# EAGLE board CAN_node_rpm_f2v (EAGLE 7.2.0)
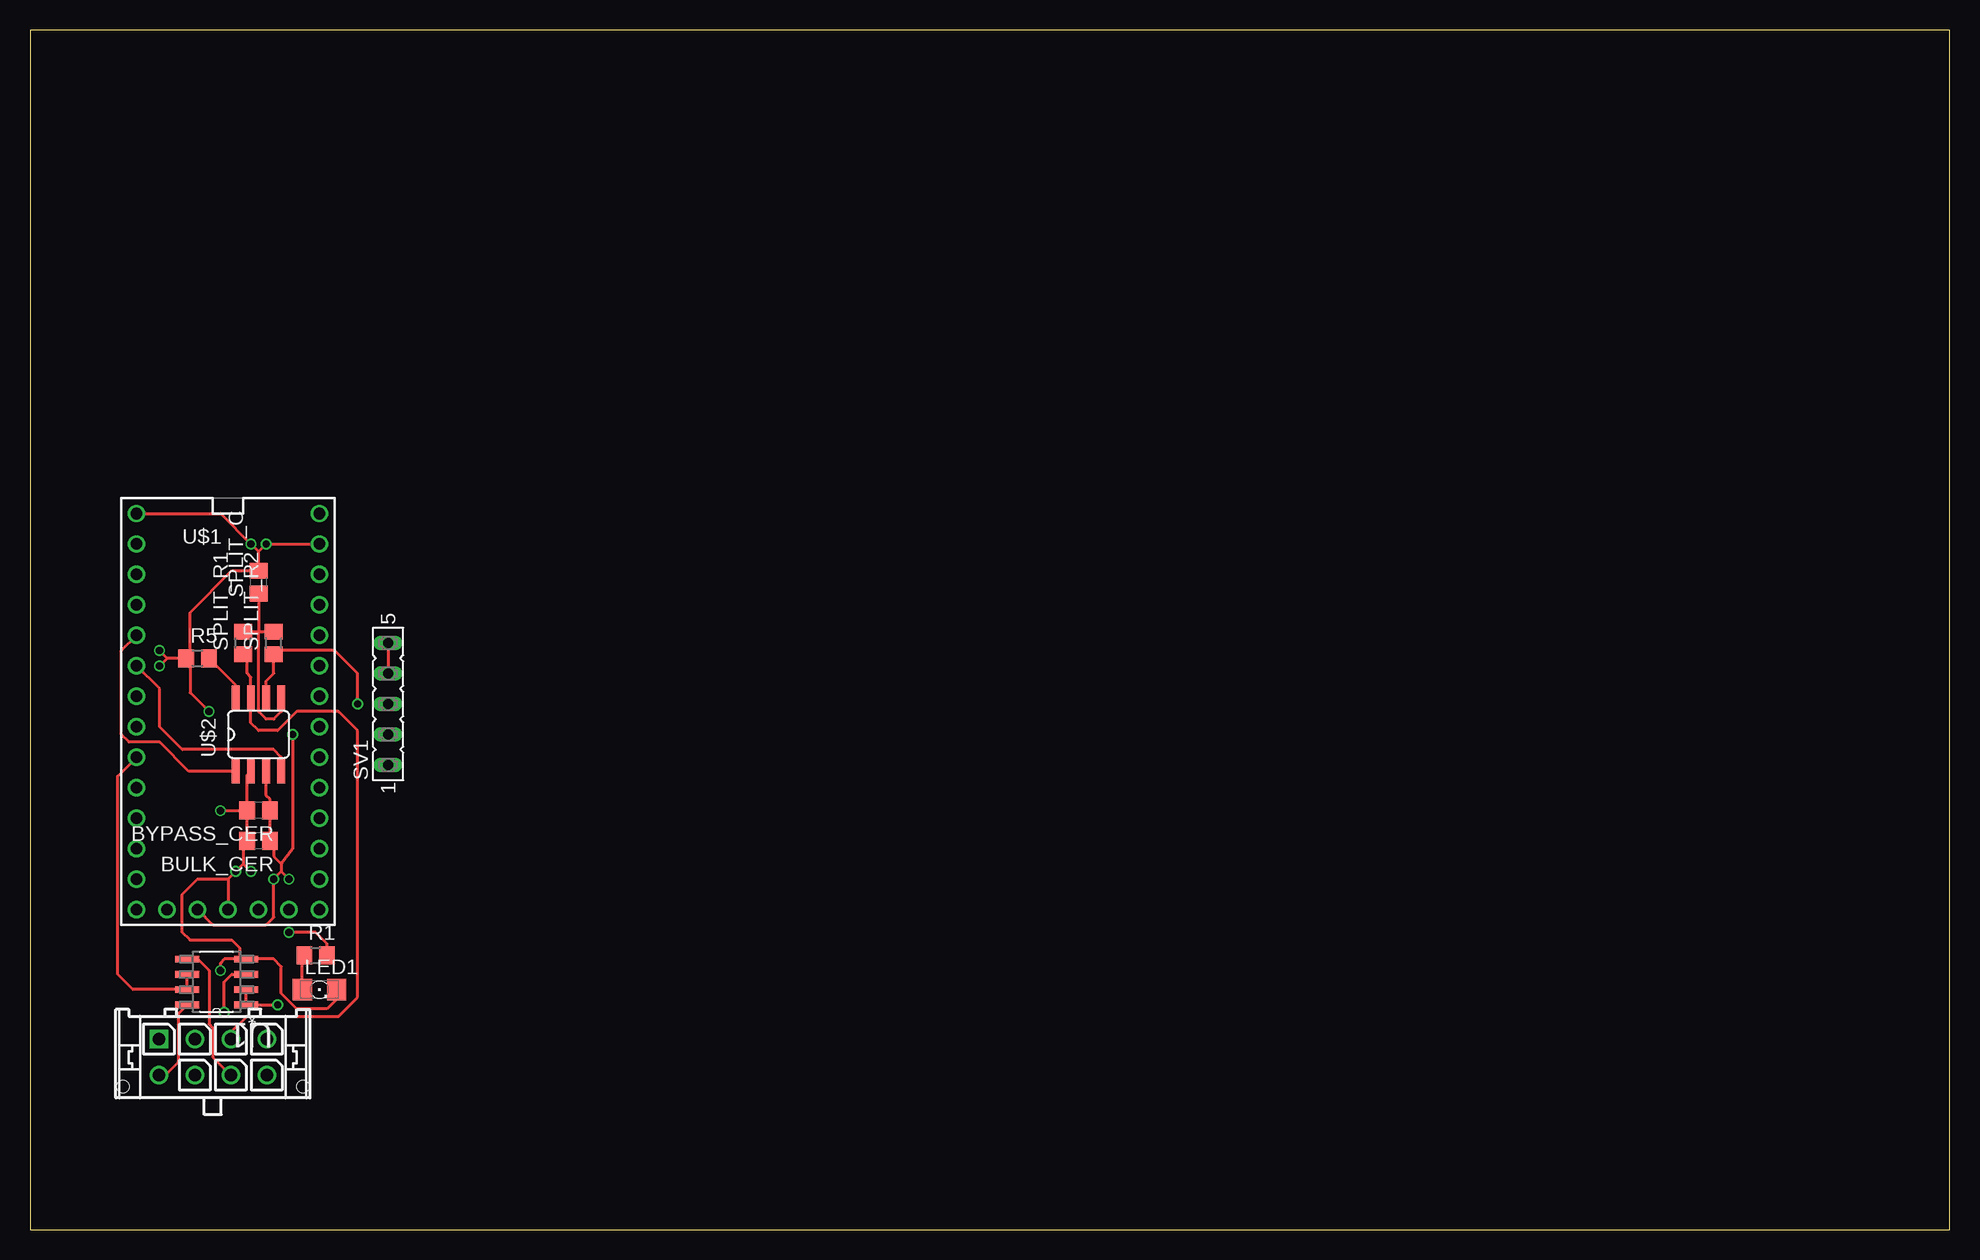
[diagram p0: board, top side]
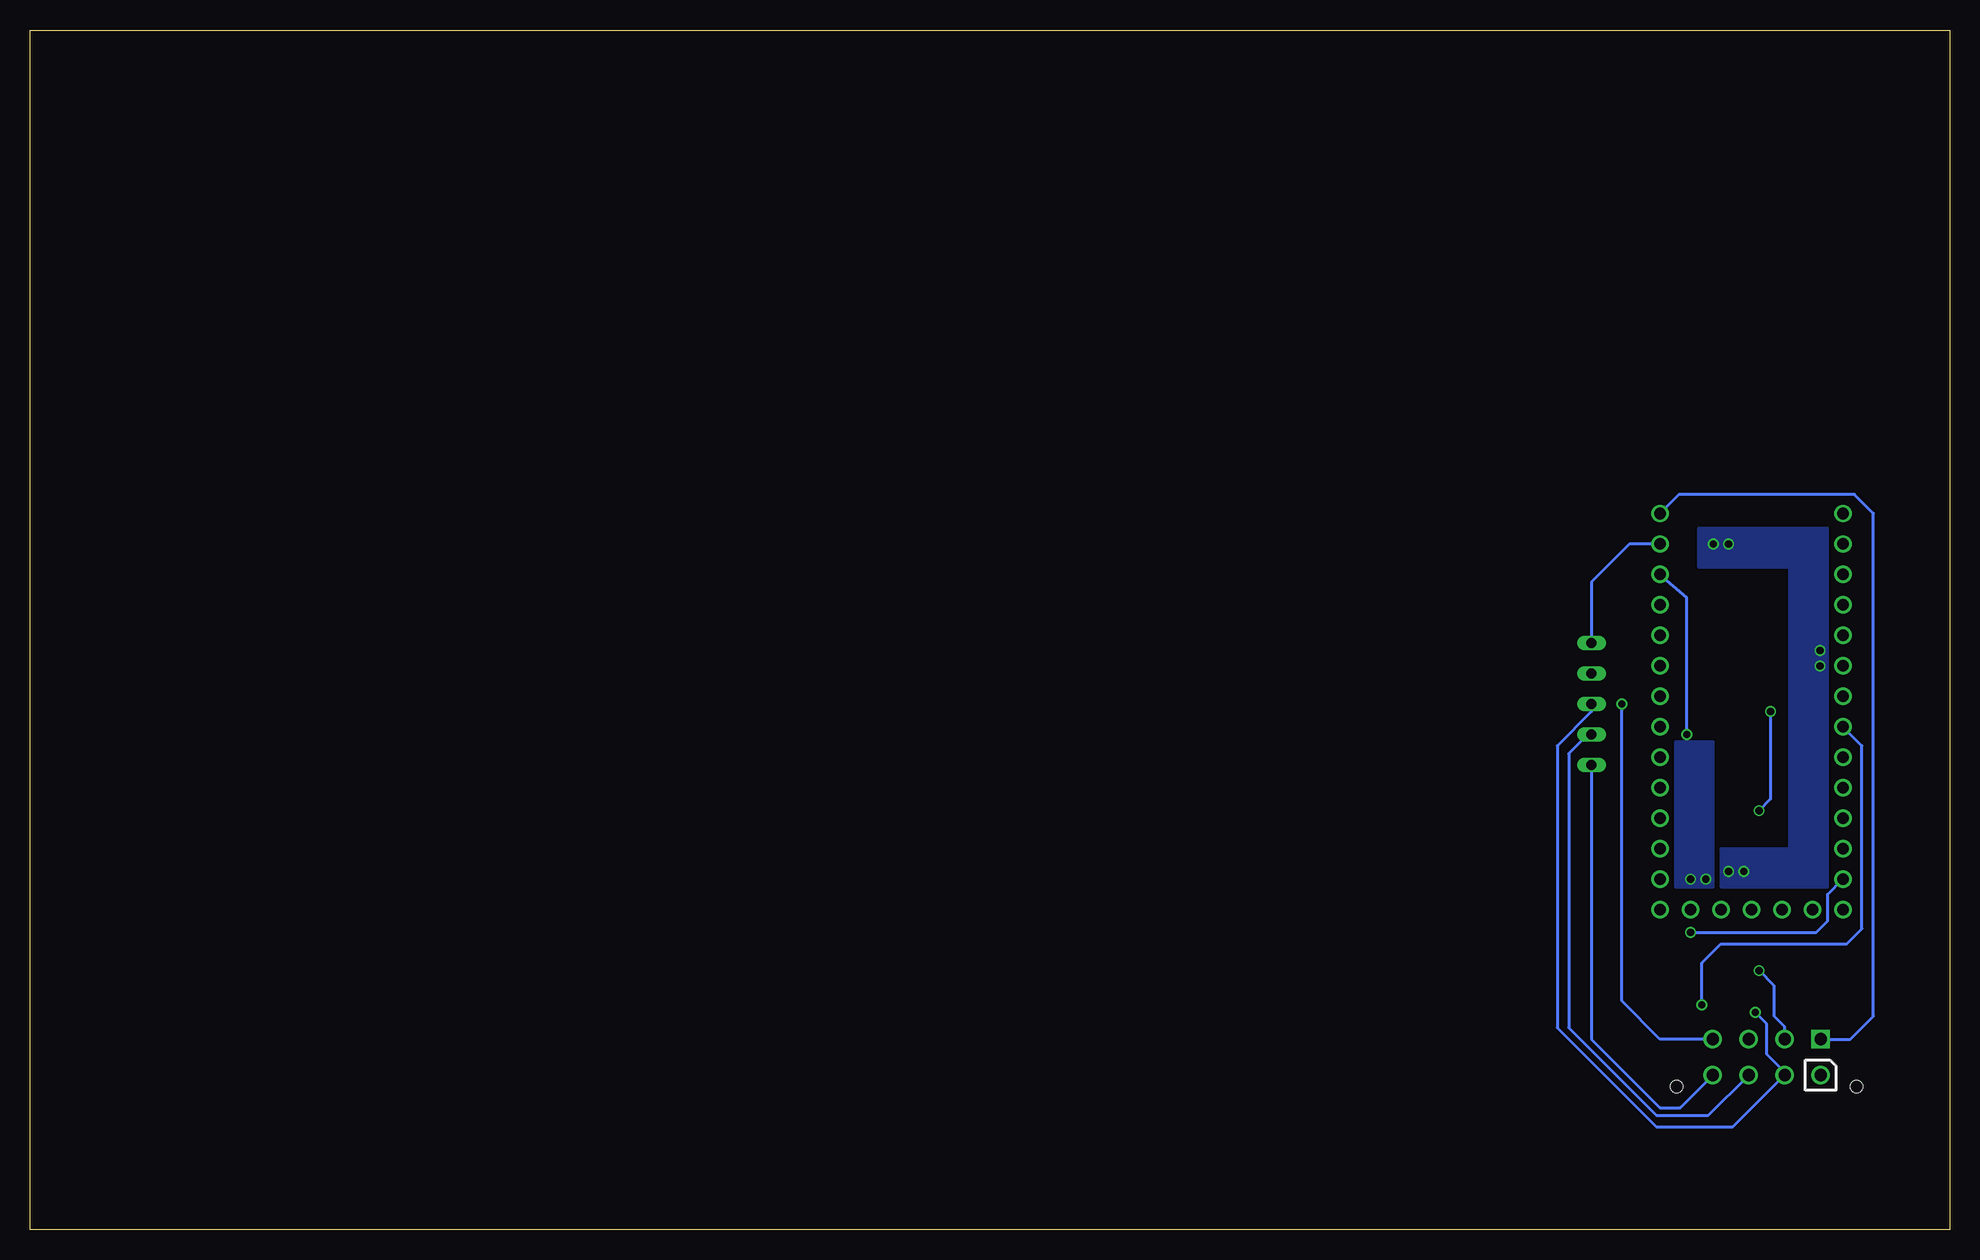
[diagram p1: board, bottom side, seen from below]

Size 160 x 100 mm. Coordinates in mm from the lower left corner, seen from the top.
Outline: 0,0 160,0 160,100 0,100 0,0
Copper layers (1*16): Top 0.035mm / dielectric 1.5mm / Bottom 0.035mm
Design rules "PCB_Power": minimum track width 5mil, minimum drill 10mil, track to track 5mil, track to pad 5mil, pad to pad 5mil, via to via 5mil, smd to smd 5mil, copper to edge 10mil, drill to drill 6mil, minimum pad ring 5mil, minimum via ring 5mil, stop-mask expansion 3mil, vias tented up to drill 0mil, thermal gap 10mil

## Footprints (pad centres in the part's own frame; a part is rotated, then mirrored left to right if it is on the bottom)
C0805 = smd 1.3 x 1.5: 1 -0.95,0; 2 0.95,0
LED_1206 = smd 1.6 x 1.803: A -1.422,0; C 1.422,0
R0805 = smd 1.3 x 1.5: 1 -0.95,0; 2 0.95,0
FE05-1 = drill 0.813 long: 1 -5.08,0; 2 -2.54,0; 3 0,0; 4 2.54,0; 5 5.08,0
SOIC127P600X175-8N = smd 1.981 x 0.559: 1 -2.464,1.905; 2 -2.464,0.635; 3 -2.464,-0.635; 4 -2.464,-1.905; 5 2.464,-1.905; 6 2.464,-0.635; 7 2.464,0.635; 8 2.464,1.905
TEENSY_3.1_BASIC = drill 0.965: 0 -7.62,13.97; 1 -7.62,11.43; 2 -7.62,8.89; 3 -7.62,6.35; 3.3V 7.62,11.43; 3.3V1 -2.54,-16.51; 4 -7.62,3.81; 5 -7.62,1.27; 6 -7.62,-1.27; 7 -7.62,-3.81; 8 -7.62,-6.35; 9 -7.62,-8.89; 10 -7.62,-11.43; 11 -7.62,-13.97; 12 -7.62,-16.51; 13 7.62,-16.51; 14/A0 7.62,-13.97; 15/A1 7.62,-11.43; 16/A2 7.62,-8.89; 17/A3 7.62,-6.35; 18/A4 7.62,-3.81; 19/A5 7.62,-1.27; 20/A6 7.62,1.27; 21/A7 7.62,3.81; 22/A8 7.62,6.35; 23/A9 7.62,8.89; A14 5.08,-16.51; AGND 7.62,13.97; GND -7.62,16.51; GND1 0,-16.51; PGM 2.54,-16.51; VBAT -5.08,-16.51; VIN 7.62,16.51
SO8 = smd 0.66 x 2.032: 1 -1.905,-3.073; 2 -0.635,-3.073; 3 0.635,-3.073; 4 1.905,-3.073; 5 1.905,3.073; 6 0.635,3.073; 7 -0.635,3.073; 8 -1.905,3.073
43045-0812 = drill 1.02 square: P$1 4.5,0 | drill 1.02: P$2 1.5,0; P$3 -1.5,0; P$4 -4.5,0; P$5 4.5,3; P$6 1.5,3; P$7 -1.5,3; P$8 -4.5,3 | hole 1.02: 7.5,3.94; -7.5,3.94

## Placement (x,y rotation side)
BULK_CER  10uF  [C0805]  19.05,32.38 180 top
BYPASS_CER  100nF  [C0805]  19.05,34.92 180 top
LED1  [LED_1206]  24.13,20 0 top
R1  [R0805]  23.81,22.86 0 top
R5  4K7  [R0805]  13.97,47.62 0 top
SPLIT_C  4n7F  [C0805]  19.05,53.98 90 top
SPLIT_R1  60E  [R0805]  17.78,48.9 90 top
SPLIT_R2  60E  [R0805]  20.32,48.9 90 top
SV1  [FE05-1]  29.84,43.81 90 top
U1  TL082ID  [SOIC127P600X175-8N]  15.56,20.64 180 top
U$1  TEENSY_3.1_BASIC  [TEENSY_3.1_BASIC]  16.51,43.18 0 top
U$2  SN65HVD230/1  [SO8]  19.05,41.27 0 top
X1  [43045-0812]  15.24,15.88 180 top

## Library data of the parts
BULK_CER BYPASS_CER R5 SPLIT_C SPLIT_R1 SPLIT_R2 = LV
LED1 = IITBRacing_CAN_node_Evo5
R1 = resistor
SV1 = con-lsta; OC_FARNELL: unknown; OC_NEWARK: unknown
U1 = Texas Instruments_By_element14_Batch_1; MPN: TL082ID; OC_FARNELL: 9593403; OC_NEWARK: 08F9350; PACKAGE: SOIC-8; SUPPLIER: TI
U$1 X1 = IIT_BOMBAY_Racing
U$2 = texas_1

## Nets
3V3: BULK_CER.1 BYPASS_CER.1 U$1.3.3V U$1.3.3V1 U$2.3
5V: U$1.VIN X1.P$1
12V: U1.8 X1.P$5
CAN_H: SPLIT_R1.1 U$2.7 X1.P$3
CAN_L: SPLIT_R2.1 U$2.6 X1.P$4
GND: BULK_CER.2 BYPASS_CER.2 LED1.C R5.1 SPLIT_C.2 SV1.4 SV1.5 U1.4 U$1.AGND U$1.GND U$1.GND1 U$2.2 X1.P$2
LED_OUT: R1.2 U$1.11
N$1: LED1.A R1.1
N$5: R5.2 U$2.8
N$9: SPLIT_C.1 SPLIT_R1.2 SPLIT_R2.2 U$2.5
RESET_CAN_NODE: SV1.1 X1.P$8
RPM_1: SV1.3 U1.3 X1.P$6
RPM_2: SV1.2 U1.5 X1.P$7
RPM_IN_1: U1.1 U1.2 U$1.6
RPM_IN_2: U1.6 U1.7 U$1.7
UC_RX: U$1.4 U$2.4
UC_TX: U$1.3 U$2.1
VBAT: U$1.VBAT

## Tracks (layer width: path | path; a pad name or v marks a point on that pad's centre or on a via)
3V3  (via drill 0.6)
  Top 0.254: U$2.3 19.68,36.2 20,35.88 BYPASS_CER.1 BULK_CER.1 20.32,32.38 20.32,31.11 20.95,30.48 | 20.95,30.48 20.95,29.84 | 20.95,29.84 v20.32,29.21 20.32,26.04 19.68,25.4 15.24,25.4 U$1.3.3V1 | 20.95,29.84 v21.59,29.21 | v21.91,41.27 21.91,31.75 20.95,30.48
  Bottom 0.254: v21.91,41.27 21.91,52.7 U$1.3.3V
  pour Bottom: 19.68,28.57 19.68,40.64 22.86,40.64 22.86,28.57
5V
  Bottom 0.254: X1.P$1 8.26,15.88 6.35,17.78 6.35,59.69 7.94,61.28 22.54,61.28 U$1.VIN
12V
  Top 0.254: X1.P$5 11.29,12.88 12.38,13.97 12.38,18.02 U1.8
CAN_H
  Top 0.254: SPLIT_R1.1 18.1,47.63 18.1,46.35 18.41,46.04 U$2.7 18.41,42.23 19.05,41.59 20.64,41.59 22.23,43.18 25.72,43.18 27.3,41.59 27.3,19.37 25.72,17.78 18.1,17.78 16.74,16.42 X1.P$3
CAN_L  (via drill 0.6)
  Top 0.254: U$2.6 19.68,45.72 20.32,46.35 SPLIT_R2.1 20.64,48.26 25.4,48.26 27.3,46.35 v27.3,43.81
  Bottom 0.254: X1.P$4 24.13,15.88 27.3,19.05 v27.3,43.81
GND  (via drill 0.6)
  Top 0.254: BYPASS_CER.2 BULK_CER.2 17.78,32.38 17.78,30.48 | 13.34,47.62 R5.1 11.43,47.62 | v10.79,46.99 11.43,47.62 | 11.43,47.62 v10.79,48.26 | 17.78,30.48 v17.14,29.84 16.51,29.21 | 17.78,30.48 v18.41,29.84 | SPLIT_C.2 19.05,56.52 | 19.05,56.52 v18.41,57.15 15.88,59.69 U$1.GND | 19.05,56.52 v19.68,57.15 U$1.AGND | 19.05,54.61 SPLIT_C.2 | BYPASS_CER.2 18.1,37.89 U$2.2 | 13.34,47.62 13.34,51.44 16.83,54.93 SPLIT_C.2 | 13.34,47.62 13.34,44.77 v14.92,43.18 | v15.88,34.92 BYPASS_CER.2 | SV1.5 SV1.4 | LED1.C 25.55,19.2 24.77,18.41 22.23,18.41 20.95,19.68 20.95,21.91 20.32,22.54 U1.4 17.46,22.54 | 17.46,22.54 16.19,22.54 15.88,22.23 v15.88,21.59 | 16.51,29.21 13.97,29.21 12.7,27.94 12.7,24.77 13.34,24.13 16.83,24.13 17.46,23.5 17.46,22.54 | 16.51,29.21 U$1.GND1
  Bottom 0.254: v14.92,43.18 14.92,35.88 v15.88,34.92 | X1.P$2 13.74,16.91 14.61,17.78 14.61,20.32 v15.88,21.59 | U$1.AGND 26.67,57.15 29.84,53.98 SV1.5
  pour Bottom: 17.14,58.42 20.95,58.42 20.95,55.24 13.34,55.24 13.34,31.75 19.05,31.75 19.05,28.57 10.16,28.57 10.16,58.42
LED_OUT  (via drill 0.6)
  Top 0.254: R1.2 24.76,23.82 23.81,24.77 v21.59,24.77
  Bottom 0.254: v21.59,24.77 11.11,24.77 10.16,25.72 10.16,27.94 U$1.11
N$1
  Top 0.254: LED1.A 22.71,22.71 R1.1
N$5
  Top 0.254: U$2.8 17.14,45.4 R5.2
N$9
  Top 0.254: U$2.5 20.95,43.18 20.32,42.55 19.68,42.55 19.05,43.18 19.05,49.84 | SPLIT_R1.2 19.05,49.84 | 19.05,49.84 SPLIT_R2.2 | SPLIT_C.1 19.05,49.84
RESET_CAN_NODE
  Bottom 0.254: 19.68,12.82 X1.P$8 22.45,10.16 24.13,10.16 29.84,15.88 SV1.1
RPM_1  (via drill 0.6)
  Top 0.254: v16.19,18.1 16.19,20.64 16.83,21.27 U1.3
  Bottom 0.254: v16.19,18.1 15.24,17.14 15.24,14.61 13.74,13.11 X1.P$6 14.42,12.2 14.61,12.01 18.04,8.57 24.45,8.57 32.7,16.83 32.7,40.32 29.84,43.18 SV1.3
RPM_2
  Top 0.254: U1.5 13.97,22.54 14.92,21.59 14.92,17.14 15.24,16.83 15.24,14.38 X1.P$7
  Bottom 0.254: SV1.2 30.16,41.27 31.75,39.69 31.75,16.83 24.45,9.53 20.09,9.53 X1.P$7
RPM_IN_1  (via drill 0.6)
  Top 0.254: U1.2 U1.1 v20.64,18.73
  Bottom 0.254: v20.64,18.73 20.64,22.23 19.05,23.81 8.57,23.81 7.3,25.08 7.3,40.32 U$1.6
RPM_IN_2
  Top 0.254: U1.6 U1.7 8.57,20 7.3,21.27 7.3,37.78 U$1.7
UC_RX
  Top 0.254: U$2.4 20.95,39.37 20.32,40.01 12.7,40.01 10.79,41.91 10.79,45.09 U$1.4
UC_TX
  Top 0.254: U$2.1 13.23,38.2 10.79,40.64 8.26,40.64 7.62,41.27 7.62,48.26 U$1.3